# Altium PCB my.PcbDoc (part 1 of 3)
Units mm, origin at the board's own origin, x right, y up, seen from the top; angles counter-clockwise.
Board outline 100 x 100 mm, 4 copper layers (Top Layer, Internal Plane 1, Internal Plane 2, Bottom Layer); 136 components, 166 nets, 575 pads, 210 vias.
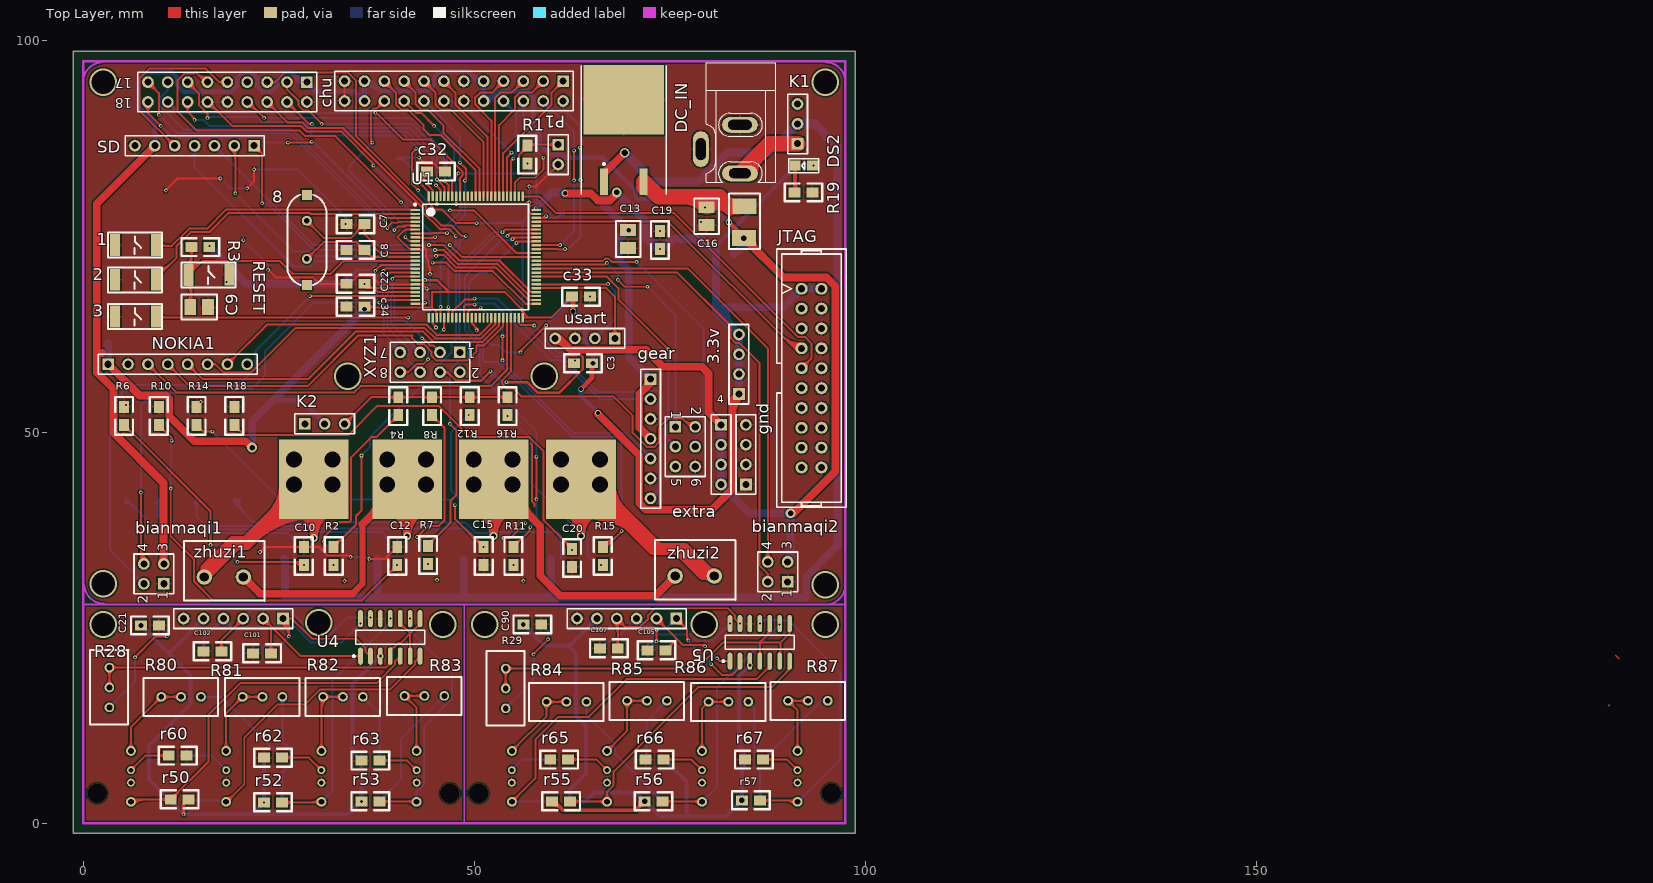
[diagram p0: Top Layer view]
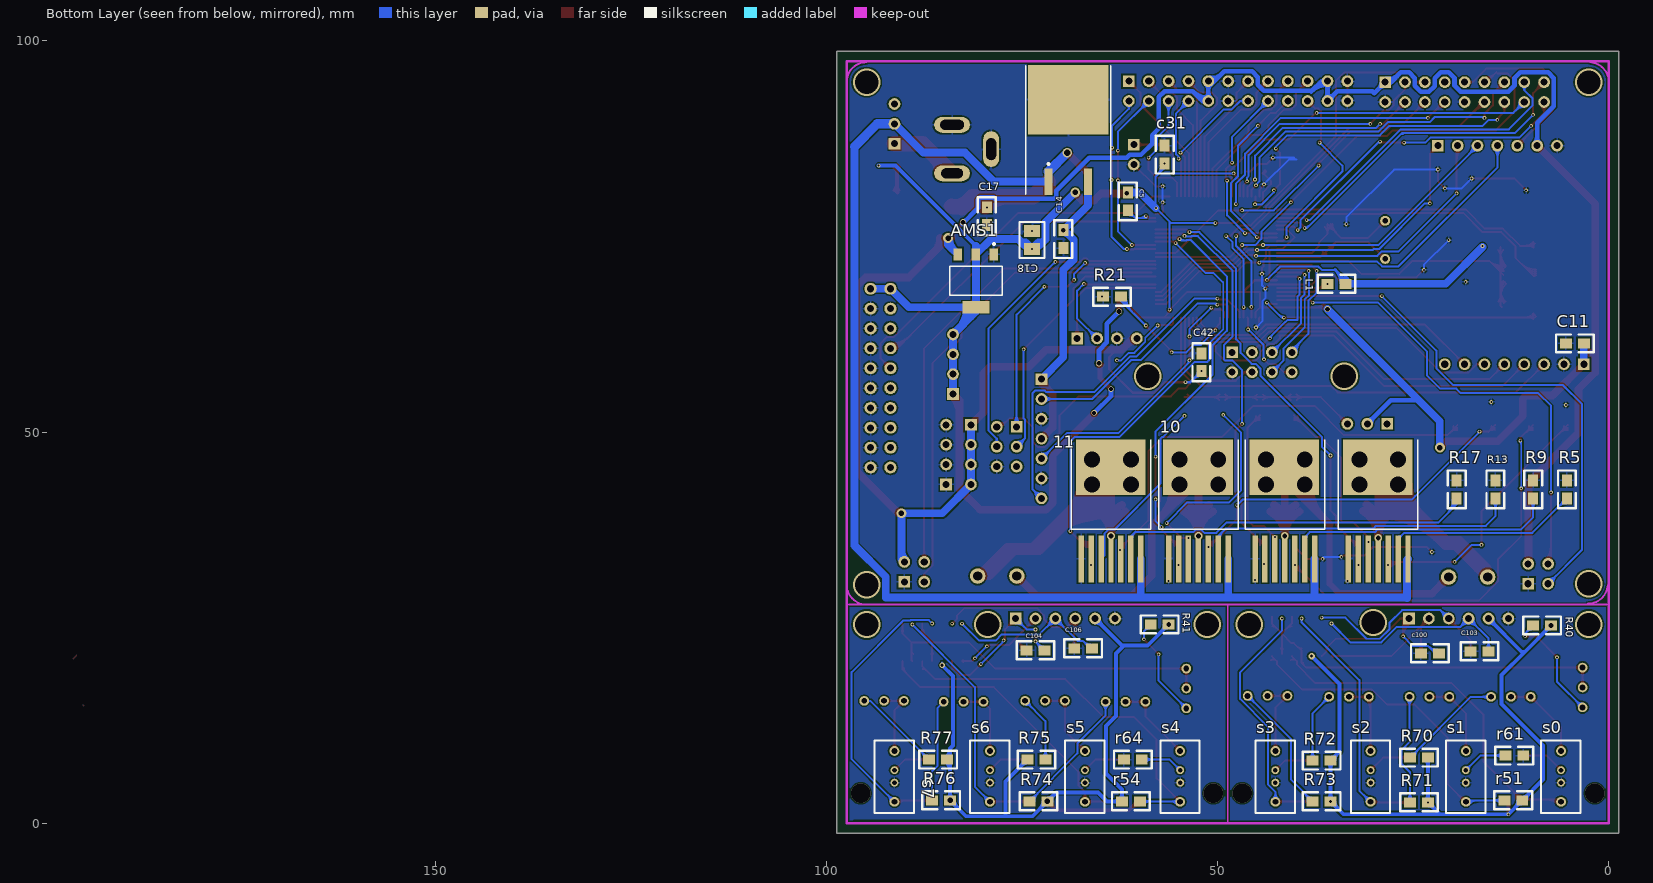
[diagram p1: Bottom Layer view, seen from below]
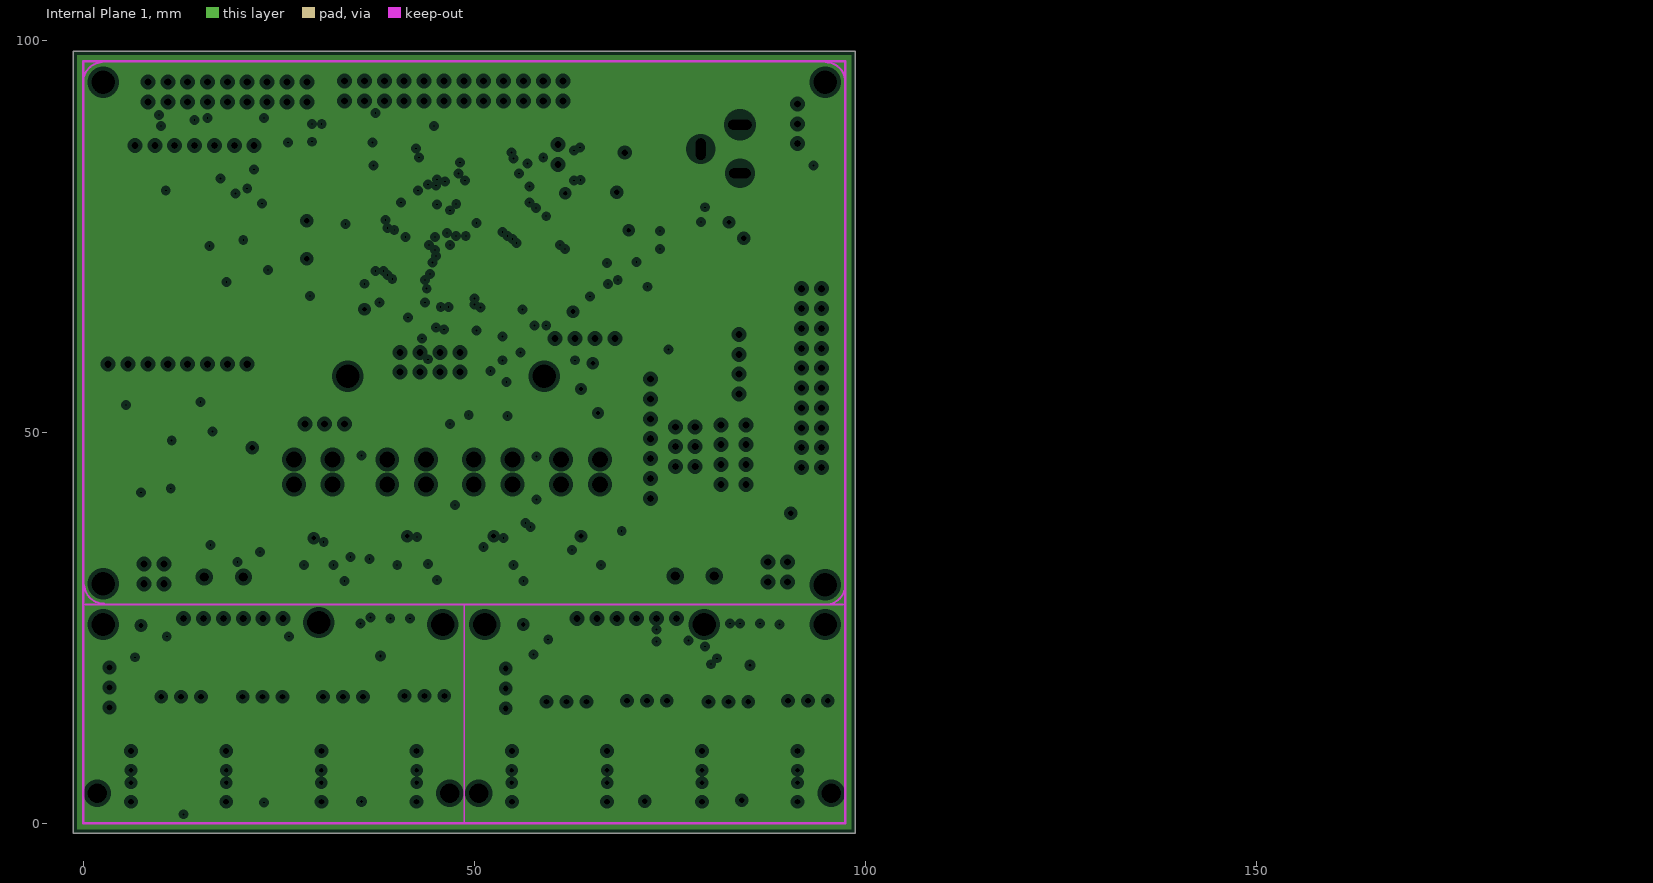
[diagram p2: Internal Plane 1, clearances drawn from the general rule]
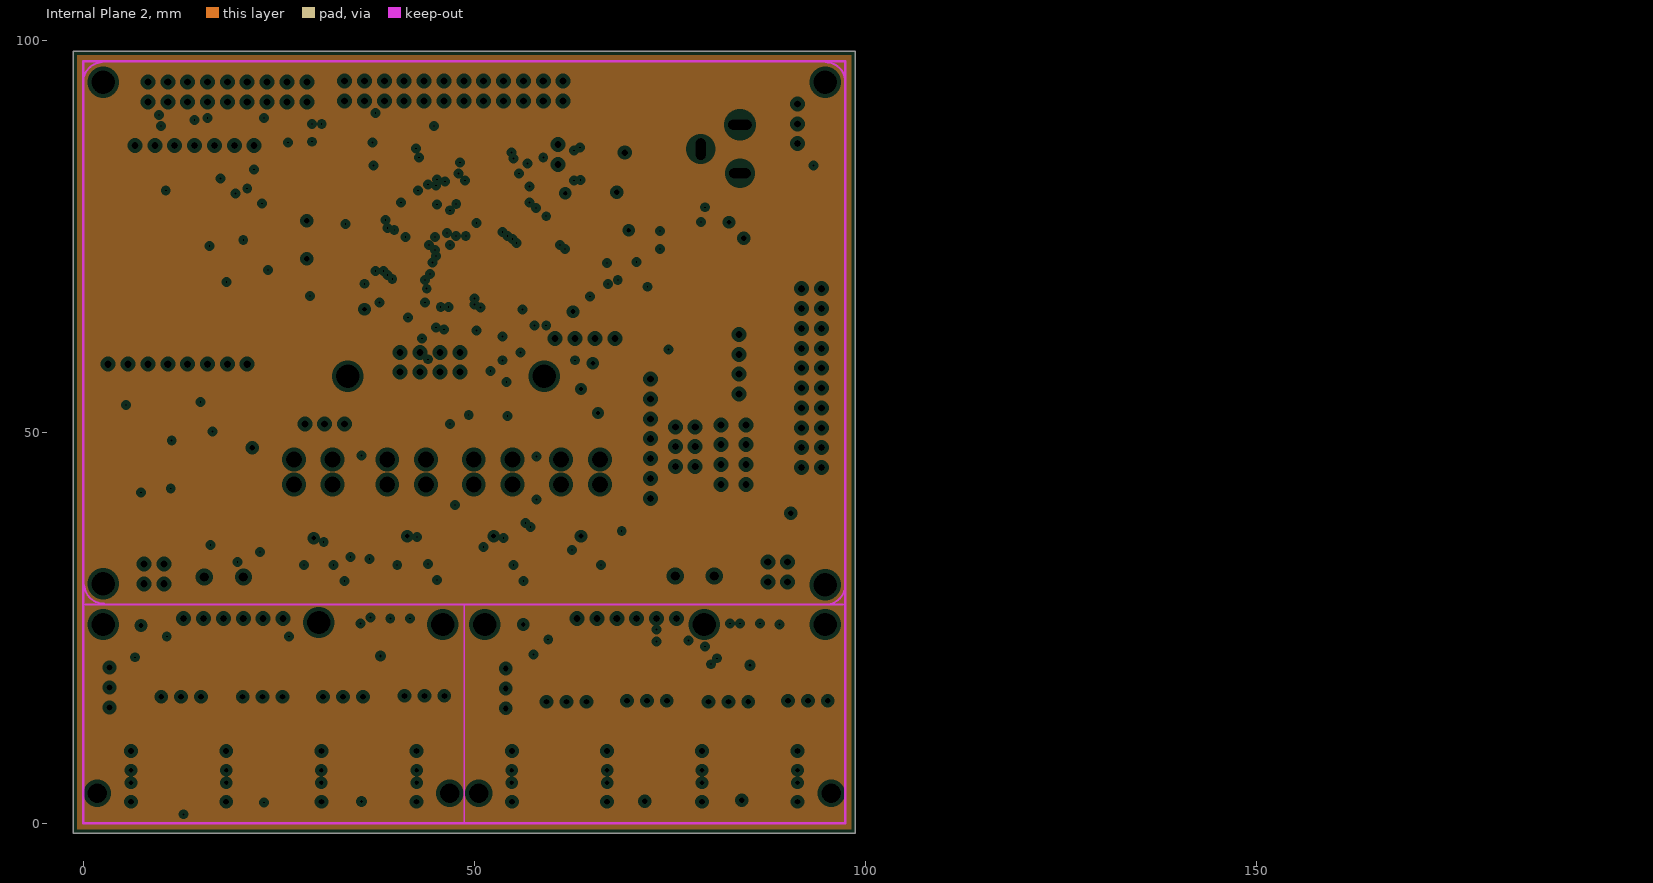
[diagram p3: Internal Plane 2, clearances drawn from the general rule]

## Layer stack, top to bottom
Top Layer: signal copper 0.0356
Dielectric: dielectric 0.32, FR-4, Dk 4.8
Internal Plane 1: plane copper 0.0356
Dielectric: dielectric 0.32, FR-4, Dk 4.8
Internal Plane 2: plane copper 0.0356
Dielectric: dielectric 0.32, FR-4, Dk 4.8
Bottom Layer: signal copper 0.0356

## Board outline
-1.3,-1.3 98.7,-1.3 98.7,98.7 -1.3,98.7

## Design rules (kind name [scope] priority, off if disabled: settings)
Clearance [All] p1: gap=0.2
PlaneClearance [All] p1: clearance=0.508
PlaneConnect [All] p1: planeconnectstyle=Relief reliefexpansion=0.508 reliefentries=4 reliefconductorwidth=0.254 reliefairgap=0.254
PolygonConnect [All] p1: connectstyle=Relief reliefconductorwidth=0.254 reliefentries=4 polygonreliefangle="90 Angle"
RoutingVias [All] p1: holewidth=0.6 width=1 viastyle="Through Hole" minholewidth=0.711 minwidth=1.27 maxholewidth=0.711 maxwidth=1.27
SilkscreenOverComponentPads [All] p1: minsilkscreentomaskgap=0.254
SolderMaskExpansion [All] p1: expansion=0.102
Width [All] p1: maxlimit=2 minlimit=0.2 preferedwidth=0.2 minimp=50.000000 maximp=50.000000 favimp=50.000000
25 further rules are at their usual default settings.

## Components (designator, comment, footprint, x,y, rotation, side; value= is the part's Value field where it differs from the comment)
1 "KEY_M" "PCBComponent_1 - duplicate3" 4.064,73.914 r270 top
2 "KEY_M" "PCBComponent_1 - duplicate3" 4.064,69.469 r270 top
3 "KEY_M" "PCBComponent_1 - duplicate3" 4.064,64.77 r270 top
3.3v "Header 4" HDR1X4 83.82,54.864 r90 top
4 "Header 4" HDR1X4 81.534,50.927 r270 top
7 "bts7960" miaoBTS7960 33.274,33.782 r90 bottom
8 "8MHz" XTAL_US 28.575,72.136 r90 top
9 "bts7960" miaoBTS7960 45.212,33.782 r90 bottom
10 "bts7960" miaoBTS7960 56.261,33.782 r90 bottom
11 "bts7960" miaoBTS7960 67.437,33.782 r90 bottom
AMS1 "REG1117-3.3" ZZ311 80.899,69.342 r0 bottom
bianmaqi1 "Header 2X2" HDR2X2 10.287,30.607 r90 top
bianmaqi2 "Header 2X2" HDR2X2 90.043,30.861 r90 top
C3 "Cap" 0805 65.024,58.801 r180 top
C5 "Cap" 0805 61.468,80.645 r270 bottom
C7 "Cap" 0805 35.941,76.581 r180 top
C8 "Cap" 0805 35.941,73.279 r180 top
C9 "Cap Pol1" "PCBCom- duplicate" 14.173,66.802 r90 top
C10 "Cap" 0805 28.194,35.306 r270 top
C11 "Cap" 0805 5.461,61.341 r180 bottom
C12 "Cap" 0805 40.132,35.306 r270 top
C13 "Cap Pol1" "PCBCom- duplicate" 70.485,75.311 r0 top
C14 "Cap" 0805 69.723,73.533 r90 bottom
C15 "Cap" 0805 51.181,33.02 r90 top
C16 "Cap Pol1" "PCBCom- duplicate" 80.518,78.232 r0 top
C17 "Cap" 0805 79.502,76.454 r90 bottom
C18 "Cap Pol1" "PCBCom- duplicate" 74.549,73.914 r0 bottom
C19 "Cap" 0805 73.724,75.692 r270 top
C20 "Cap" 0805 62.484,32.766 r90 top
C21 "Cap" 0805 9.652,25.273 r180 top
C22 "Cap" 0805 35.941,68.961 r180 top
c31 "Cap" 0805 56.769,86.614 r270 bottom
c32 "Cap" 0805 46.228,83.312 r180 top
c33 "Cap" 0805 64.77,67.31 r180 top
c34 "Cap" 0805 33.655,66.04 r0 top
C42 "Cap" 0805 52.07,57.785 r90 bottom
C90 "Cap" 0805 58.547,25.4 r180 top
c100 "Cap" 0805 21.717,21.717 r0 bottom (schematic designator C100)
C101 "Cap" 0805 24.003,21.717 r180 top
C102 "Cap" 0805 17.653,21.971 r180 top
C103 "Cap" 0805 15.367,21.973 r0 bottom
C104 "Cap" 0805 72.136,22.098 r0 bottom
C105 "Cap" 0805 74.422,22.1 r180 top
C106 "Cap" 0805 66.04,22.352 r0 bottom
C107 "Cap" 0805 68.326,22.354 r180 top
camera1 "Header 9X2" HDR2X9 28.575,94.742 r180 top
chu "Header 12X2" HDR2X12 61.341,94.869 r180 top
chu1 "Header 6" HDR1X6 25.527,26.162 r180 top
chu2 "Header 6" HDR1X6 75.819,26.162 r180 top
DC_IN "POWER" DC10B 79.629,93.726 r270 top
DS2 "LED1" SMDLED 93.218,84.074 r180 top
extra "Header 3X2" HDR2X3 75.692,50.673 r270 top
gear "Header 7" HDR1X7 72.517,56.769 r270 top
gnd "Header 4" HDR1X4 84.709,43.307 r90 top
JTAG "JTAG" JTAG_20 93.091,56.896 r270 top
K1 "Header 3" HDR1X3 91.313,86.868 r90 top
K2 "Header 3" HDR1X3 28.321,51.054 r0 top
L1 "" 0805 35.941,68.961 r180 bottom
NOKIA1 "Header 8" HDR1X8 3.175,58.674 r0 top
P1 "Header 2" HDR1X2 60.706,86.741 r270 top
R1 "Res2" 0805 56.769,84.328 r90 top
R2 "10k" 0805 32.004,33.02 r90 top
R3 "Res2" 0805 13.818,73.66 r0 top
R4 "Res2" 0805 40.259,52.168 r90 top
R5 "Res2" 0805 5.337,41.529 r90 bottom
R6 "Res2" 0805 5.207,50.927 r90 top
R7 "Res2" 0805 44.069,33.147 r90 top
R8 "Res2" 0805 44.577,52.168 r90 top
R9 "Res2" 0805 9.655,41.529 r90 bottom
R10 "Res2" 0805 9.652,50.927 r90 top
R11 "Res2" 0805 54.991,33.02 r90 top
R12 "Res2" 0805 49.403,52.168 r90 top
R13 "Res2" 0805 14.478,41.529 r90 bottom
R14 "Res2" 0805 14.478,50.927 r90 top
R15 "Res2" 0805 66.421,33.02 r90 top
R16 "Res2" 0805 54.229,52.168 r90 top
R17 "Res2" 0805 19.431,41.529 r90 bottom
R18 "Res2" 0805 19.304,50.927 r90 top
R19 "Res2" 0805 90.932,80.645 r0 top
R21 "Res2" 0805 64.643,67.31 r180 bottom
R28 "Res Tap" "PCBComponent_1 - duplicate2" 3.302,13.589 r90 top
R29 "Res Tap" "PCBComponent_1 - duplicate2" 53.975,13.462 r90 top
R40 "Res2" 0805 7.366,25.273 r0 bottom
R41 "Res2" 0805 56.261,25.4 r0 bottom
r50 "Res2" 0805 13.462,3.048 r180 top
r51 "Res2" 0805 11.049,2.921 r0 bottom
r52 "Res2" 0805 23.114,2.667 r0 top
r53 "Res2" 0805 35.56,2.794 r0 top
r54 "Res2" 0805 62.23,2.794 r180 bottom
r55 "Res2" 0805 59.944,2.794 r0 top
r56 "Res2" 0805 71.755,2.794 r0 top
r57 "Res2" 0805 84.201,2.921 r0 top
r60 "Res2" 0805 13.208,8.636 r180 top
r61 "Res2" 0805 10.922,8.636 r0 bottom
r62 "Res2" 0805 23.114,8.382 r0 top
r63 "Res2" 0805 35.56,8.001 r0 top
r64 "Res2" 0805 61.976,8.128 r180 bottom
r65 "Res2" 0805 59.69,8.128 r0 top
r66 "Res2" 0805 71.882,8.128 r0 top
r67 "Res2" 0805 84.582,8.128 r0 top
R70 "Res2" 0805 23.114,8.382 r0 bottom
R71 "Res2" 0805 23.114,2.667 r0 bottom
R72 "Res2" 0805 35.56,8.001 r0 bottom
R73 "Res2" 0805 35.56,2.792 r0 bottom
R74 "Res2" 0805 71.755,2.792 r0 bottom
R75 "Res2" 0805 74.295,8.128 r180 bottom
R76 "Res2" 0805 84.201,2.923 r0 bottom
R77 "Res2" 0805 84.582,8.128 r0 bottom
R80 "Res Tap" "PCBComponent_1 - duplicate2" 16.256,16.129 r180 top
R81 "Res Tap" "PCBComponent_1 - duplicate2" 26.67,16.129 r180 top
R82 "Res Tap" "PCBComponent_1 - duplicate2" 36.957,16.129 r180 top
R83 "Res Tap" "PCBComponent_1 - duplicate2" 47.371,16.256 r180 top
R84 "Res Tap" "PCBComponent_1 - duplicate2" 65.532,15.494 r180 top
R85 "Res Tap" "PCBComponent_1 - duplicate2" 75.819,15.621 r180 top
R86 "Res Tap" "PCBComponent_1 - duplicate2" 86.233,15.494 r180 top
R87 "Res Tap" "PCBComponent_1 - duplicate2" 96.393,15.621 r180 top
RESET "KEY_M" "PCBComponent_1 - duplicate3" 13.462,70.104 r270 top
s0 "chazuo" "PCBComponent_1 - duplicate1" 6.088,9.231 r270 bottom
s1 "chazuo" "PCBComponent_1 - duplicate1" 18.263,9.231 r270 bottom
s2 "chazuo" "PCBComponent_1 - duplicate1" 30.438,9.231 r270 bottom
s3 "chazuo" "PCBComponent_1 - duplicate1" 42.613,9.231 r270 bottom
s4 "chazuo" "PCBComponent_1 - duplicate1" 54.788,9.231 r270 bottom
s5 "chazuo" "PCBComponent_1 - duplicate1" 66.963,9.231 r270 bottom
s6 "chazuo" "PCBComponent_1 - duplicate1" 79.1,9.231 r270 bottom
s7 "chazuo" "PCBComponent_1 - duplicate1" 91.312,9.231 r270 bottom
SAFE "" 1812 84.455,77.851 r180 top
SD "Header 7" HDR1X7 21.844,86.614 r180 top
U1 "STM32F407VET6" LQFP100_V 50.165,72.39 r0 top
U2 "L7805ABD2T" TO-263 69.088,87.249 r180 bottom
U3 "L7805ABD2T" TO-263 69.088,87.249 r0 top
U4 "LM339AD" SO14_N 39.243,23.749 r90 top
U5 "LM339AD" SO14_N 86.487,23.114 r90 top
usart "Header 4" HDR1X4 67.945,61.976 r180 top
XYZ1 "Header 4X2" HDR2X4 48.133,60.198 r180 top
zhuzi1 "Header 2H" "PCBComponent_1 - duplicate" 18.288,32.385 r0 top
zhuzi2 "Header 2H" "PCBComponent_1 - duplicate" 78.486,32.512 r0 top

## Footprints (in the part's own frame and the unit in brackets; to place one, negate y for a bottom-side part, rotate by r counter-clockwise, add the part's x,y. Pads: shape width x height; smd on the part's side, far side on the other; paste and mask are expansions set on the pad)
0805 [mil]
  rect 60x50 smd: 1(0,-0.06) 2(90,-0.06)
  silkscreen extent -50,-45 140,45
1812 [mil]
  rect 120x80 smd: 1(0,120) 2(-2.5,-40)
  silkscreen extent -80,-105 75,175
DC10B [mil]
  oval 80x180 hole 50 slot 110 at 90 deg: 1(419.09,170)
  oval 80x180 hole 50 slot 120 at 90 deg: 2(175,170)
  oval 180x80 hole 50 slot 110 at 0 deg: 3(297.05,-26.85)
  silkscreen extent -138,0 465,350
HDR1X2 [mm] "Connector; Header; 2 Position"
  rect 1.5x1.5 hole 0.9: 1(0,0)
  round 1.5 hole 0.9: 2(2.54,0)
  silkscreen extent -1.27,-1.27 3.81,1.27
HDR1X3 [mm] "Connector; Header; 3 Position"
  rect 1.5x1.5 hole 0.9: 1(0,0)
  round 1.5 hole 0.9: 2(2.54,0) 3(5.08,0)
  silkscreen extent -1.27,-1.27 6.35,1.27
HDR1X4 [mm] "Connector; Header; 4 Position"
  rect 1.5x1.5 hole 0.9: 1(0,0)
  round 1.5 hole 0.9: 2(2.54,0) 3(5.08,0) 4(7.62,0)
  silkscreen extent -1.27,-1.27 8.89,1.27
HDR1X6 [mm] "Connector; Header; 6 Position"
  rect 1.5x1.5 hole 0.9: 1(0,0)
  round 1.5 hole 0.9: 2(2.54,0) 3(5.08,0) 4(7.62,0) 5(10.16,0) 6(12.7,0)
  silkscreen extent -1.27,-1.27 13.97,1.27
HDR1X7 [mm] "Connector; Header; 7 Position"
  rect 1.5x1.5 hole 0.9: 1(0,0)
  round 1.5 hole 0.9: 2(2.54,0) 3(5.08,0) 4(7.62,0) 5(10.16,0) 6(12.7,0) 7(15.24,0)
  silkscreen extent -1.27,-1.27 16.51,1.27
HDR1X8 [mm] "Connector; Header; 8 Position"
  rect 1.5x1.5 hole 0.9: 1(0,0)
  round 1.5 hole 0.9: 2(2.54,0) 3(5.08,0) 4(7.62,0) 5(10.16,0) 6(12.7,0) 7(15.24,0) 8(17.78,0)
  silkscreen extent -1.27,-1.27 19.05,1.27
HDR2X2 [mm] "Connector; Header; 2x2 Position"
  rect 1.5x1.5 hole 0.9: 1(0,0)
  round 1.5 hole 0.9: 2(0,2.54) 3(2.54,0) 4(2.54,2.54)
  silkscreen extent -1.27,-1.27 3.81,3.81
HDR2X3 [mm] "Connector; Header; 3x2 Position"
  rect 1.5x1.5 hole 0.9: 1(0,0)
  round 1.5 hole 0.9: 2(0,2.54) 3(2.54,0) 4(2.54,2.54) 5(5.08,0) 6(5.08,2.54)
  silkscreen extent -1.27,-1.27 6.35,3.81
HDR2X4 [mm] "Connector; Header; 4x2 Position"
  rect 1.5x1.5 hole 0.9: 1(0,0)
  round 1.5 hole 0.9: 2(0,2.54) 3(2.54,0) 4(2.54,2.54) 5(5.08,0) 6(5.08,2.54) 7(7.62,0) 8(7.62,2.54)
  silkscreen extent -1.27,-1.27 8.89,3.81
HDR2X9 [mm] "Connector; Header; 9x2 Position"
  rect 1.5x1.5 hole 0.9: 1(0,0)
  round 1.5 hole 0.9: 2(0,2.54) 3(2.54,0) 4(2.54,2.54) 5(5.08,0) 6(5.08,2.54) 7(7.62,0) 8(7.62,2.54) 9(10.16,0) 10(10.16,2.54) 11(12.7,0) 12(12.7,2.54) 13(15.24,0) 14(15.24,2.54) 15(17.78,0) 16(17.78,2.54) 17(20.32,0) 18(20.32,2.54)
  silkscreen extent -1.27,-1.27 21.59,3.81
HDR2X12 [mm] "Connector; Header; 12x2 Position"
  rect 1.5x1.5 hole 0.9: 1(0,0)
  round 1.5 hole 0.9: 2(0,2.54) 3(2.54,0) 4(2.54,2.54) 5(5.08,0) 6(5.08,2.54) 7(7.62,0) 8(7.62,2.54) 9(10.16,0) 10(10.16,2.54) 11(12.7,0) 12(12.7,2.54) 13(15.24,0) 14(15.24,2.54) 15(17.78,0) 16(17.78,2.54) 17(20.32,0) 18(20.32,2.54) 19(22.86,0) 20(22.86,2.54) 21(25.4,0) 22(25.4,2.54) 23(27.94,0) 24(27.94,2.54)
  silkscreen extent -1.27,-1.27 29.21,3.81
JTAG_20 [mm]
  oval 1.5x1.575 hole 0.9: 1(-11.43,-1.27) 2(-11.43,1.27) 3(-8.89,-1.27) 4(-8.89,1.27) 5(-6.35,-1.27) 6(-6.35,1.27) 7(-3.81,-1.27) 8(-3.81,1.27) 9(-1.27,-1.27) 10(-1.27,1.27) 11(1.27,-1.27) 12(1.27,1.27) 13(3.81,-1.27) 14(3.81,1.27) 15(6.35,-1.27) 16(6.35,1.27) 17(8.89,-1.27) 18(8.89,1.27) 19(11.43,-1.27) 20(11.43,1.27)
  silkscreen extent -16.51,-4.45 16.51,4.45
LQFP100_V [mm] "Thin QFP, 100-Leads, Body 14x14mm, Pitch 0.5mm, ST Recommended"
  rect 1.2x0.3 smd: 1(-7.75,6) 2(-7.75,5.5) 3(-7.75,5) 4(-7.75,4.5) 5(-7.75,4) 6(-7.75,3.5) 7(-7.75,3) 8(-7.75,2.5) 9(-7.75,2) 10(-7.75,1.5) 11(-7.75,1) 12(-7.75,0.5) 13(-7.75,0) 14(-7.75,-0.5) 15(-7.75,-1) 16(-7.75,-1.5) 17(-7.75,-2) 18(-7.75,-2.5) 19(-7.75,-3) 20(-7.75,-3.5) 21(-7.75,-4) 22(-7.75,-4.5) 23(-7.75,-5) 24(-7.75,-5.5) 25(-7.75,-6) 51(7.75,-6) 52(7.75,-5.5) 53(7.75,-5) 54(7.75,-4.5) 55(7.75,-4) 56(7.75,-3.5) 57(7.75,-3) 58(7.75,-2.5) 59(7.75,-2) 60(7.75,-1.5) 61(7.75,-1) 62(7.75,-0.5) 63(7.75,0) 64(7.75,0.5) 65(7.75,1) 66(7.75,1.5) 67(7.75,2) 68(7.75,2.5) 69(7.75,3) 70(7.75,3.5) 71(7.75,4) 72(7.75,4.5) 73(7.75,5) 74(7.75,5.5) 75(7.75,6)
  rect 0.3x1.2 smd: 26(-6,-7.75) 27(-5.5,-7.75) 28(-5,-7.75) 29(-4.5,-7.75) 30(-4,-7.75) 31(-3.5,-7.75) 32(-3,-7.75) 33(-2.5,-7.75) 34(-2,-7.75) 35(-1.5,-7.75) 36(-1,-7.75) 37(-0.5,-7.75) 38(0,-7.75) 39(0.5,-7.75) 40(1,-7.75) 41(1.5,-7.75) 42(2,-7.75) 43(2.5,-7.75) 44(3,-7.75) 45(3.5,-7.75) 46(4,-7.75) 47(4.5,-7.75) 48(5,-7.75) 49(5.5,-7.75) 50(6,-7.75) 76(6,7.75) 77(5.5,7.75) 78(5,7.75) 79(4.5,7.75) 80(4,7.75) 81(3.5,7.75) 82(3,7.75) 83(2.5,7.75) 84(2,7.75) 85(1.5,7.75) 86(1,7.75) 87(0.5,7.75) 88(0,7.75) 89(-0.5,7.75) 90(-1,7.75) 91(-1.5,7.75) 92(-2,7.75) 93(-2.5,7.75) 94(-3,7.75) 95(-3.5,7.75) 96(-4,7.75) 97(-4.5,7.75) 98(-5,7.75) 99(-5.5,7.75) 100(-6,7.75)
  silkscreen extent -7.87,-6.75 6.75,6.82, body extent -7,-7 7,7, height 1.6
miaoBTS7960 [mm]
  rect 6x0.7 smd: 1(0,0) 2(0,-1.27) 3(0,-2.54) 4(0,-3.81) 5(0,-5.08) 6(0,-6.35) 7(0,-7.62)
  round 2.54 hole 2.032: 4(9.525,-6.35) 4(9.525,-1.397) 4(12.7,-6.35) 4(12.7,-1.397)
  rect 10.16x8.89 smd far side: 4(10.16,-3.81)
  rect 7.112x8.89 smd: 4(11.709,-3.759)
  silkscreen extent 3.81,-8.89 15.24,1.27
"PCBCom- duplicate" [mil]
  rect 80x60 smd: 1(-32.5,20) 2(-32.5,-70)
  silkscreen extent -95,-115 30,65
"PCBComponent_1 - duplicate" [mil]
  round 78 hole 47.24: 1(-111,-36) 2(85.85,-36)
  silkscreen extent -213,-156 192,144
"PCBComponent_1 - duplicate1" [mm]
  round 1.25 hole 0.75: 1(0,0) 4(6.5,0)
  round 1 hole 0.6: 2(2.45,0) 3(4.05,0)
  silkscreen extent -1.35,-2.54 7.95,2.49
"PCBComponent_1 - duplicate2" [mm]
  round 1.25 hole 0.75: 1(1.219,-0.025) 2(3.759,-0.025) 3(6.299,-0.025)
  silkscreen extent -0.99,-2.46 8.54,2.43
"PCBComponent_1 - duplicate3" [mm] "Circuit Brea"
  rect 2.8x1.27 smd: 1(-0.025,5.2) 2(0,0)
  silkscreen extent -1.6,-0.94 1.6,6.02
SMDLED [mm]
  rect 1.4x1.27 smd: 1(0.001,-0.002) 2(2.211,-0.002)
  silkscreen extent -0.8,-0.89 3.01,0.89
SO14_N [mm] "SOIC, 14-Leads, Body 8.7x3.9mm, Pitch 1.27mm, IPC Medium Density"
  oval 2.2x0.6 smd: 1(-2.4,3.81) 2(-2.4,2.54) 3(-2.4,1.27) 4(-2.4,0) 5(-2.4,-1.27) 6(-2.4,-2.54) 7(-2.4,-3.81) 8(2.4,-3.81) 9(2.4,-2.54) 10(2.4,-1.27) 11(2.4,0) 12(2.4,1.27) 13(2.4,2.54) 14(2.4,3.81)
  silkscreen extent -2.52,-4.4 0.9,4.78, body extent -1.95,-4.33 1.95,4.33, height 1.75
TO-263 [mm] "D2-PAK/TO-263-AB; 3 Leads (1 Cropped); Body 15.9 (inc. leads) x 10.4 mm (LxW max)"
  rect 1x3.4 smd: 1(-2.54,-5.225) 3(2.54,-5.225)
  rect 10.25x8.9 smd: 4(0,5.225)
  silkscreen extent -5.43,-6.83 5.43,9.57
XTAL_US [mil]
  round 50 hole 28: 1(0,0) 2(192.13,0)
  rect 50x50 smd: ""(-130.32,0) ""(322.44,0)
  silkscreen extent -131,-98 323,98
ZZ311 [mm] "SOT-223/SC-73; 4 Leads; Body 6.7 x 7.3 mm, inc. leads (LxW max)"
  rect 1.1x1.55 smd: 1(-2.3,-3.375) 2(0,-3.375) 3(2.3,-3.375)
  rect 3.45x1.55 smd: 4(0,3.375)
  silkscreen extent -3.35,-4.82 3.35,1.85

## Part data
3.3v 4 gnd usart: "Header, 4-Pin"
8: library part XTAL, "Cryst"
AMS1: "800mA and 1A Low Dropout Positive Regulator 2.85V, 3.3V, 5V, and Adjustable"
bianmaqi1 bianmaqi2: "Header, 2-Pin, Dual row"
C9 C13 C16 C18: "Polarized Capacitor (Radial)"
camera1: "Header, 9-Pin, Dual row"
chu: "Header, 12-Pin, Dual row"
chu1 chu2: "Header, 6-Pin"
DS2: library part LED2, "Typical RED, GREEN, YELLOW, A"
extra: "Header, 3-Pin, Dual row"
gear SD: "Header, 7-Pin"
K1 K2: "Header, 3-Pin"
L1 R2: library part Res2, "Re"
NOKIA1: "Header, 8-Pin"
P1: "Header, 2-Pin"
R1 R3 R4 R5 R6 R7 R8 R9 R10 R11 R12 R13 R14 R15 R16 R17 R18 R19 R21 R40 R41 r50 r51 r52 r53 r54 r55 r56 r57 r60 r61 r62 r63 r64 r65 r66 r67 R70 R71 R72 R73 R74 R75 R76 R77: "Re"
R28 R29 R80 R81 R82 R83 R84 R85 R86 R87: "Tapped Resistor"
SAFE: library part Cap, "Capacitor"
U1: "ARM Cortex-M4 32b MCU+FPU, 210DMIP, 512 kB Flash, 192+4 kB RAM, Camera, 82 I/Os, 100-pin LQFP, -40 to +85癈, Tray"
U2 U3: "Precision 1A Regulator"
U4 U5: "Low-Power Quad Voltage Comparator"
XYZ1: "Header, 4-Pin, Dual row"
zhuzi1 zhuzi2: "Header, 2-Pin, Right Angle"

## Via types
v1: diameter 0.457, hole 0.254, Top Layer to Bottom Layer, 170 vias
v2: diameter 3.5, hole 3, Top Layer to Bottom Layer, 12 vias
v3: diameter 0.8, hole 0.6, Top Layer to Bottom Layer, 7 vias
v4: diameter 1.27, hole 0.711, Top Layer to Bottom Layer, 6 vias
v5: diameter 1, hole 0.6, Top Layer to Bottom Layer, 5 vias
v6: diameter 2.5, hole 2.5, Top Layer to Bottom Layer, tented bottom, 4 vias
v7: diameter 0.7, hole 0.5, Top Layer to Bottom Layer, 2 vias
v8: diameter 0.8, hole 0.4, Top Layer to Bottom Layer, 2 vias
v9: diameter 0.7, hole 0.4, Top Layer to Bottom Layer, 1 vias
v10: diameter 1.2, hole 0.8, Top Layer to Bottom Layer, 1 vias

## Nets (pads, with @x,y where several pads share a name; then routed paths per layer and width w, separated by ;. In a path a pad name is that pad's centre, name@x,y a point inside that pad or via, vN(x,y) a via of type N, cw(c..) or ccw(c..) an arc to the next point about the centre after c; other vN are vias at no path point)
A0: chu.1 U1.81 | length 21.7
  Top Layer w0.254: U1.81@53.665,80.14 53.665,85.67 59.878,91.883 59.878,93.406 chu.1@61.341,94.869 ; chu.1@60.718,94.869 cw(c59.214,94.869) 60.277,93.805 cw(c61.341,92.742) chu.1@61.341,94.246 ; chu.1@60.972,94.869 cw(c60.081,94.869) 60.711,94.239 cw(c61.341,93.609) chu.1@61.341,94.5
A1: chu.3 U1.82 | length 21.7
  Top Layer w0.254: U1.82@53.165,80.14 53.165,89.233 55.184,91.252 55.184,92.775 55.815,93.406 57.338,93.406 chu.3@58.801,94.869 ; chu.3@58.178,94.869 cw(c56.674,94.869) 57.737,93.805 cw(c58.801,92.742) chu.3@58.801,94.246 ; chu.3@58.432,94.869 cw(c57.541,94.869) 58.171,94.239 cw(c58.801,93.609) chu.3@58.801,94.5
A2: chu.5 U1.83 | length 20.9
  Top Layer w0.254: U1.83@52.665,80.14 52.644,80.161 52.644,92.775 53.275,93.406 54.798,93.406 chu.5@56.261,94.869 ; chu.5@55.638,94.869 cw(c54.134,94.869) 55.197,93.805 cw(c56.261,92.742) chu.5@56.261,94.246 ; chu.5@55.892,94.869 cw(c55.001,94.869) 55.631,94.239 cw(c56.261,93.609) chu.5@56.261,94.5
A3: chu.7 U1.84 | length 21.7
  Top Layer w0.254: U1.84@52.165,80.14 52.165,89.822 50.104,91.883 50.104,92.775 50.735,93.406 52.258,93.406 chu.7@53.721,94.869 ; chu.7@53.098,94.869 cw(c51.594,94.869) 52.657,93.805 cw(c53.721,92.742) chu.7@53.721,94.246 ; chu.7@53.352,94.869 cw(c52.461,94.869) 53.091,94.239 cw(c53.721,93.609) chu.7@53.721,94.5
A4: chu.13 U1.85 | length 20.8
  Top Layer w0.254: chu.13@46.101,94.246 cw(c46.101,92.742) 47.165,93.805 cw(c48.228,94.869) chu.13@46.724,94.869 ; chu.13@46.101,94.5 cw(c46.101,93.609) 46.731,94.239 cw(c47.361,94.869) chu.13@46.47,94.869 ; chu.13@46.101,94.869 47.564,93.406 47.564,91.883 51.665,87.782 U1.85@51.665,80.14
A5: chu.15 U1.86 | length 22.4
  Top Layer w0.254: chu.15@43.561,94.246 cw(c43.561,92.742) 44.625,93.805 cw(c45.688,94.869) chu.15@44.184,94.869 ; chu.15@43.561,94.5 cw(c43.561,93.609) 44.191,94.239 cw(c44.821,94.869) chu.15@43.93,94.869 ; chu.15@43.561,94.869 45.024,93.406 45.024,91.883 45.655,91.252 46.981,91.252 51.165,87.068 U1.86@51.165,80.14
A6: chu.17 U1.87 | length 23
  Top Layer w0.254: chu.17@41.021,94.246 cw(c41.021,92.742) 42.085,93.805 cw(c43.148,94.869) chu.17@41.644,94.869 ; chu.17@41.021,94.5 cw(c41.021,93.609) 41.651,94.239 cw(c42.281,94.869) chu.17@41.39,94.869 ; chu.17@41.021,94.869 42.484,93.406 42.484,91.883 43.115,91.252 44.002,91.252 46.04,89.214 46.04,88.269 50.665,83.644 U1.87@50.665,80.14
A7: chu.19 U1.88 | length 24.7
  Top Layer w0.254: chu.19@38.481,94.246 cw(c38.481,92.742) 39.545,93.805 cw(c40.608,94.869) chu.19@39.104,94.869 ; chu.19@38.481,94.5 cw(c38.481,93.609) 39.111,94.239 cw(c39.741,94.869) chu.19@38.85,94.869 ; chu.19@38.481,94.869 39.944,93.406 39.944,91.883 40.575,91.252 41.462,91.252 43.5,89.214 43.5,88.708 44.229,87.979 45.688,87.979 50.165,83.502 U1.88@50.165,80.14
ANG: U1.30 XYZ1.8 | length 12.6
  Top Layer w0.254: XYZ1.8@40.513,57.658 41.53,57.658 ; XYZ1.8@41.068,57.375 cw(c41.53,57.14) 41.53,57.658 ; XYZ1.8@41.068,57.941 ccw(c41.53,58.176) 41.53,57.658 ; v1(44.069,59.309) 43.495,58.735 42.607,58.735 41.53,57.658 ; v1@46.029,63.191 ccw(c45.757,63.463) 46.142,63.463 ; v1(46.101,63.119) 46.142,63.16 46.142,64.617 U1.30@46.165,64.64
  Bottom Layer w0.254: v1@43.997,59.381 ccw(c43.676,59.702) 44.13,59.702 ; v1(44.069,59.309) 44.13,59.37 44.13,61.148 v1(46.101,63.119) ; v1@45.999,63.119 cw(c45.754,63.119) 45.928,62.946 cw(c46.101,62.772) v1@46.101,63.017
BLACK1: bianmaqi1.4 U1.24 | length 69.1
  Top Layer w0.254: v1@7.294,42.219 cw(c7.121,42.046) 7.366,42.046 cw(c7.611,42.046) v1@7.438,42.219 ; 7.366,34.344 ccw(c8.944,34.344) bianmaqi1.4@7.828,33.228 ; 7.366,34.958 ccw(c9.558,34.958) bianmaqi1.4@8.008,33.408 ; 7.366,35.571 ccw(c10.171,35.571) bianmaqi1.4@8.188,33.588 ; v1(7.366,42.291) 7.366,33.528 bianmaqi1.4@7.747,33.147 ; v1(37.846,66.548) 38.188,66.89 U1.24@42.415,66.89
  Bottom Layer w0.254: v1@7.294,42.363 ccw(c7.121,42.536) 7.366,42.536 ccw(c7.611,42.536) v1@7.438,42.363 ; v1(7.366,42.291) 7.366,53.34 9.017,54.991 18.923,54.991 19.485,55.553 21.517,55.553 23.241,57.277 23.241,60.325 29.464,66.548 v1(37.846,66.548) ; v1@37.774,66.476 ccw(c37.601,66.303) 37.601,66.548 ccw(c37.601,66.793) v1@37.774,66.62
BLACK2: bianmaqi2.4 U1.60 | length 64.9
  Top Layer w0.254: U1.60@57.915,70.89 77.319,70.89 87.503,60.706 bianmaqi2.4@87.503,33.401 ; bianmaqi2.4@87.062,33.842 ccw(c85.999,34.905) 87.503,34.905 ccw(c89.007,34.905) bianmaqi2.4@87.944,33.842 ; bianmaqi2.4@87.242,33.662 ccw(c86.612,34.292) 87.503,34.292 ccw(c88.394,34.292) bianmaqi2.4@87.764,33.662
CS0: SD.4 U1.51 | length 58
  Top Layer w0.254: v1(44.667,71.669) 46.396,71.669 47.491,70.574 52.362,70.574 56.546,66.39 U1.51@57.915,66.39
  Bottom Layer w0.254: SD.4@13.783,86.173 cw(c12.72,85.11) 14.224,85.11 cw(c15.728,85.11) SD.4@14.665,86.173 ; SD.4@13.963,86.353 cw(c13.333,85.723) 14.224,85.723 cw(c15.115,85.723) SD.4@14.485,86.353 ; SD.4@14.224,86.614 14.224,83.82 26.87,71.174 28.973,71.174 29.602,71.803 44.534,71.803 v1(44.667,71.669)
D0: camera1.11 U1.63 | length 67.7
  Top Layer w0.254: 14.478,95.885 ccw(c15.742,97.149) camera1.11@15.841,95.364 ; 14.88,95.483 ccw(c15.784,96.387) camera1.11@15.855,95.11 ; 14.991,95.372 cw(c14.361,94.742) camera1.11@15.252,94.742 ; camera1.11@15.875,94.742 15.621,94.742 14.351,96.012 14.158,95.819 12.889,95.819 12.065,94.995 12.065,90.932 14.425,88.572 27.633,88.572 28.325,87.88 32.135,87.88 v1(40.64,79.375) ; v1@40.538,79.375 ccw(c40.293,79.375) 40.467,79.548 ccw(c40.64,79.722) v1@40.64,79.477 ; v1@46.863,73.812 cw(c46.863,73.567) 47.036,73.741 cw(c47.21,73.914) v1@46.965,73.914 ; v1(46.863,73.914) 48.387,72.39 U1.63@57.915,72.39
  Bottom Layer w0.254: v1@40.64,79.273 cw(c40.64,79.028) 40.813,79.202 cw(c40.987,79.375) v1@40.742,79.375 ; v1(40.64,79.375) 44.412,75.603 44.412,74.69 45.188,73.914 v1(46.863,73.914) ; v1@46.791,73.842 ccw(c46.618,73.669) 46.618,73.914 ccw(c46.618,74.159) v1@46.791,73.986
D1: camera1.12 U1.64 | length 54.9
  Top Layer w0.254: camera1.12@15.875,91.579 cw(c15.875,89.768) 17.155,91.049 ; camera1.12@15.875,91.833 cw(c15.875,90.636) 16.722,91.482 ; camera1.12@15.875,92.202 16.002,92.202 19.057,89.147 27.806,89.147 28.554,88.398 33.012,88.398 37.084,84.326 v1@37.084,84.263 ; camera1.12@16.498,92.202 ccw(c17.695,92.202) 16.849,91.355 ; 36.732,84.678 cw(c36.128,84.074) v1@36.982,84.074 ; v1(46.863,78.359) 49.911,78.359 55.245,73.025 ; v1@46.935,78.287 cw(c47.108,78.114) 47.108,78.359 cw(c47.108,78.604) v1@46.935,78.431 ; 55.38,72.89 U1.64@57.915,72.89
  Bottom Layer w0.254: v1@37.084,83.972 cw(c37.084,83.727) 37.257,83.901 cw(c37.431,84.074) v1@37.186,84.074 ; v1(37.084,84.074) 42.799,78.359 v1(46.863,78.359) ; v1@46.791,78.287 ccw(c46.618,78.114) 46.618,78.359 ccw(c46.618,78.604) v1@46.791,78.431
D2: camera1.13 U1.97 | length 46.1
  Top Layer w0.254: camera1.13@13.335,94.119 cw(c13.335,92.615) 14.399,93.678 cw(c15.462,94.742) camera1.13@13.958,94.742 ; camera1.13@13.335,94.373 cw(c13.335,93.482) 13.965,94.112 cw(c14.595,94.742) camera1.13@13.704,94.742 ; camera1.13@13.335,94.742 14.798,93.279 14.798,91.756 15.875,90.679 v1(15.875,90.17) ; v1(45.085,81.534) 45.665,80.954 U1.97@45.665,80.14 U1.97@45.642,80.163
  Bottom Layer w0.254: v1@15.947,90.098 cw(c16.427,89.618) 16.427,90.297 ; v1@16.002,90.297 22.201,90.297 22.884,89.614 28.218,89.614 29.434,88.398 41.323,88.398 44.656,85.065 44.656,82.066 45.085,81.637 v1(45.085,81.534)
D3: camera1.14 U1.98 | length 46.2
  Top Layer w0.254: camera1.14@12.954,91.709 cw(c12.352,90.932) 13.335,90.932 ; camera1.14@13.109,91.91 cw(c12.753,91.45) 13.335,91.45 cw(c13.917,91.45) camera1.14@13.561,91.91 ; camera1.14@13.335,92.202 13.335,90.932 ; camera1.14@13.716,91.709 ccw(c14.318,90.932) 13.335,90.932 ; 13.961,90.306 cw(c13.571,89.916) v1@14.122,89.916 ; v1(14.224,89.916) 14.224,90.043 13.335,90.932 ; v1(42.545,86.233) 42.037,85.725 42.037,81.661 v1(42.799,80.899) ; U1.98@45.165,80.14 45.165,79.168 v1(45.212,79.121)
  Bottom Layer w0.254: v1(14.224,89.916) 15.343,89.916 16.099,89.16 28.03,89.16 29.246,87.944 41.088,87.944 v1@42.672,86.36 ; v1@14.296,89.844 cw(c14.469,89.671) 14.469,89.916 cw(c14.469,90.161) v1@14.296,89.988 ; 42.799,80.645 44.323,79.121 v1(45.212,79.121)
D3.3V: 3.3v.1 3.3v.2 3.3v.3 3.3v.4 AMS1.2 AMS1.4 C3.1 C5.1 C11.2 C18.1 C19.2 c31.2 c32.2 c33.2 c34.2 DS2.1 JTAG.1 JTAG.2 K2.2 L1.2 NOKIA1.1 R1.1 R3.2 U1.6 U1.11 U1.19 U1.28 U1.50 U1.75 U1.100 | length 346
  Top Layer w0.254: c34.2@35.954,65.708 cw(c36.45,65.212) c34.2@36.45,65.913 ; c34.2@36.134,65.528 cw(c37.064,64.598) 37.064,65.913 ; c34.2@36.193,65.913 44.604,65.913 ; c34.2@36.248,66.218 ccw(c36.984,66.954) 36.984,65.913 ; c34.2@36.427,65.679 cw(c36.992,65.115) 36.992,65.913 ; c34.2@36.427,66.398 ccw(c37.597,67.567) 37.597,65.913 ; U1.6@42.415,75.89 41.226,75.89 41.082,75.746 40.979,75.746 40.163,74.93 41.68,73.413 42.392,73.413 U1.11@42.415,73.39 42.438,73.367 43.15,73.367 43.342,73.175 43.342,69.482 43.434,69.39 ; U1.19@42.672,69.413 42.695,69.39 U1.19@42.718,69.367 ; c32.2@44.165,83.091 43.18,82.106 43.18,81.661 44.165,80.676 U1.100@44.165,80.14 ; U1.100@44.188,80.117 U1.100@44.165,80.14 ; U1.28@45.165,64.64 45.142,64.663 45.142,65.375 44.604,65.913 ; v1@50.22,76.636 ccw(c50.047,76.463) 50.047,76.708 ccw(c50.047,76.953) v1@50.22,76.78 ; v1(50.292,76.708) 47.597,76.708 45.867,78.438 44.982,78.438 44.165,79.255 U1.100@44.165,80.14 ; v1@56.032,65.659 ccw(c55.787,65.659) 55.961,65.832 ccw(c56.134,66.006) v1@56.134,65.761 ; U1.50@56.165,64.64 56.896,64.64 ; v1@56.165,65.628 v1(56.134,65.659) ; v1@56.236,65.659 ccw(c57.101,65.659) 56.489,65.047 ; U1.75@57.848,78.457 U1.75@57.915,78.39 ; 61.4,66.228 ccw(c60.316,67.312) c33.2@61.849,67.312 ; 61.707,66.534 cw(c62.357,65.884) c33.2@62.357,66.804 ; 61.834,66.661 ccw(c61.183,67.312) c33.2@62.103,67.312 ; c33.2@62.484,67.312 59.812,64.64 56.896,64.64 ; 44.604,65.913 44.604,67.913 46.736,67.913 53.88,67.913 v1(56.134,65.659) ; v1(56.134,65.659) 56.134,65.402 56.896,64.64
  Top Layer w0.3: U1.19@42.415,69.39 42.695,69.39 43.434,69.39 45.259,69.39 46.736,67.913
  Top Layer w0.5: c32.2@43.942,83.314 c32.2@44.165,83.091
  Top Layer w0.6: c33.2@62.374,67.075 cw(c61.802,66.503) 62.611,66.503 cw(c63.42,66.503) c33.2@62.848,67.075 ; c33.2@62.484,67.312 62.611,67.185 v3(62.611,65.405) ; v7(63.627,55.499) 65.024,56.896 C3.1@65.024,58.803 ; C3.1@64.787,58.566 cw(c64.215,57.994) 65.024,57.994 cw(c65.833,57.994) C3.1@65.261,58.566 ; C3.1@65.024,58.253 cw(c65.699,58.253) C3.1@65.222,58.73
  Top Layer w1: NOKIA1.1@3.175,58.674 7.174,54.675 10.579,54.675 10.989,54.265 10.989,52.031 14.19,48.83 20.766,48.83 v4(21.59,48.006) ; v3(61.595,80.518) 64.864,80.518 65.758,79.624 67.338,79.624 68.199,80.485 v4(68.199,80.645) ; v7@65.786,52.324 71.067,47.043 71.067,40.928 71.916,40.079 80.357,40.079 82.984,42.706 82.984,54.028 3.3v.1@83.82,54.864 ; 82.984,52.242 cw(c86.442,52.242) 3.3v.1@83.997,54.687
  Bottom Layer w0.254: L1.2@33.655,69.469 34.925,70.739 36.679,70.739 37.108,71.168 41.989,71.168 v1(43.688,69.469) ; v1(50.292,76.708) 55.931,76.708 56.134,76.911 ; v1@50.364,76.636 cw(c50.537,76.463) 50.537,76.708 cw(c50.537,76.953) v1@50.364,76.78 ; v1@56.062,65.731 ccw(c55.889,65.904) 56.134,65.904 ccw(c56.379,65.904) v1@56.206,65.731 ; v1(56.134,65.659) 56.134,76.911 ; c31.2@56.771,83.818 57.912,82.677 v1@57.912,78.626 ; c31.2@57.023,84.172 ccw(c58.151,84.044) 57.348,83.241 ; c31.2@57.275,84.143 ccw(c58.82,83.967) 57.721,82.868 ; v1@57.747,78.626 cw(c57.502,78.626) 57.675,78.453 cw(c57.848,78.279) v1@57.848,78.524 ; v1@57.777,78.698 ccw(c57.45,79.025) 57.912,79.025 ; v1(57.848,78.626) 56.134,76.911
  Bottom Layer w0.4: L1.2@33.817,68.959 cw(c35.438,68.959) 34.292,70.106 ; L1.2@34.217,68.959 cw(c36.804,68.959) 34.975,70.789
  Bottom Layer w0.5: c31.2@56.771,83.818 v1(56.771,84.328) ; 80.899,73.787 91.186,84.074 v1(93.345,84.074)
  Bottom Layer w0.6: 24.289,54.07 27.845,54.07 K2.2@30.861,51.054 ; K2.2@30.411,51.054 ccw(c29.325,51.054) 30.093,51.822 ccw(c30.861,52.59) K2.2@30.861,51.504 ; v3(62.611,65.405) 64.155,63.861 64.155,61.458 65.151,60.462 v3(65.151,58.801) ; v7(63.627,55.499) 63.627,54.61 v7(65.786,52.451)
  Bottom Layer w1: NOKIA1.1@3.175,58.674 C11.2@3.175,61.339 ; v1@16.129,73.66 20.83,68.959 L1.2@33.655,68.959 L1.2@33.655,69.469 ; v4(21.59,48.006) 21.59,51.37 24.289,54.07 v3(35.941,65.721) ; v1@57.912,78.626 59.931,80.645 C5.1@61.47,80.645 ; v4(68.199,80.645) 72.007,76.837 72.007,74.64 72.418,74.23 72.9,74.23 v1(73.724,73.406) 74.547,74.23 75.029,74.23 75.475,74.676 78.955,74.676 AMS1.2@80.899,72.732 ; 80.899,73.787 AMS1.2@80.899,72.732 ; AMS1.4@81.129,66.049 ccw(c82.755,65.864) 81.598,64.706 ; AMS1.4@82.122,65.936 ccw(c85.388,65.564) 83.064,63.24 ; 3.3v.1@83.82,54.864 3.3v.2@83.82,57.404 3.3v.3@83.82,59.944 3.3v.4@83.82,62.484 80.899,65.405 AMS1.4@80.899,65.967 ; JTAG.2@94.361,68.326 JTAG.1@91.821,68.326 89.462,65.967 AMS1.4@80.899,65.967 ; AMS1.4@80.899,65.967 AMS1.2@80.899,72.717 AMS1.2@80.899,72.732 ; 72.633,74.014 ccw(c73.469,74.851) 73.469,73.668 cw(c73.469,74.851) 72.633,74.014 ; C18.1@73.977,73.668 ccw(c73.977,74.851) 74.814,74.014 cw(c73.977,74.851) C18.1@73.977,73.668
  other v1: 16.129,73.787
D4: camera1.15 U1.3 | length 43.5
  Top Layer w0.254: v1(38.608,77.089) 38.909,77.39 U1.3@42.415,77.39
  Bottom Layer w0.254: camera1.15@10.512,94.187 cw(c10.277,93.725) 10.795,93.725 ; camera1.15@10.795,94.742 10.795,93.725 ; camera1.15@11.078,94.187 ccw(c11.313,93.725) 10.795,93.725 ; v1(38.608,77.089) 38.227,77.089 26.61,88.706 12.767,88.706 9.718,91.756 9.718,92.648 10.795,93.725
D5: camera1.16 U1.92 | length 48.8
  Top Layer w0.254: v1@37.338,90.703 cw(c37.338,90.067) 37.788,90.517 40.929,87.376 44.423,87.376 48.498,83.301 48.498,82.841 48.165,82.508 U1.92@48.165,80.14
  Bottom Layer w0.254: camera1.16@10.795,91.579 cw(c10.795,90.075) 11.859,91.138 cw(c12.922,92.202) camera1.16@11.418,92.202 ; camera1.16@10.795,91.833 cw(c10.795,90.942) 11.425,91.572 cw(c12.055,92.202) camera1.16@11.164,92.202 ; camera1.16@10.795,92.202 12.192,90.805 v1(37.338,90.805) ; v1@37.266,90.733 ccw(c37.093,90.56) 37.093,90.805 ccw(c37.093,91.05) v1@37.266,90.877
D6: camera1.17 U1.4 | length 49.8
  Top Layer w0.254: camera1.17@8.255,94.119 cw(c8.255,92.615) 9.319,93.678 cw(c10.382,94.742) camera1.17@8.878,94.742 ; camera1.17@8.255,94.373 cw(c8.255,93.482) 8.885,94.112 cw(c9.515,94.742) camera1.17@8.624,94.742 ; camera1.17@8.255,94.742 9.652,93.345 v1(9.652,90.551) ; v1@9.58,90.623 ccw(c9.407,90.796) 9.652,90.796 ccw(c9.897,90.796) v1@9.724,90.623 ; v1(38.862,76.073) 38.862,76.2 39.424,76.762 40.186,76.762 40.314,76.89 U1.4@42.415,76.89 ; v1@38.964,76.073 cw(c39.515,76.073) 39.125,76.463
  Bottom Layer w0.254: v1@9.652,90.449 cw(c9.652,90.204) 9.825,90.378 cw(c9.999,90.551) v1@9.754,90.551 ; v1(9.652,90.551) 11.951,88.252 26.415,88.252 26.529,88.138 ; 26.289,88.138 26.529,88.138 ; 38.243,76.431 ccw(c38.862,77.05) v1@38.862,76.175 ; v1(38.862,76.073) 38.601,76.073 26.536,88.138 26.529,88.138
D7: camera1.18 U1.5 | length 48.8
  Top Layer w0.254: camera1.18@7.839,91.738 cw(c7,90.805) 8.255,90.805 ; camera1.18@8.008,91.927 cw(c7.512,91.375) 8.255,91.375 cw(c8.998,91.375) camera1.18@8.502,91.927 ; camera1.18@8.255,92.202 8.255,90.805 ; camera1.18@8.671,91.738 ccw(c9.51,90.805) 8.255,90.805 ; v1@9.804,89.154 ccw(c9.559,89.154) 9.733,89.327 ccw(c9.906,89.501) v1@9.906,89.256 ; v1(9.906,89.154) 8.255,90.805 ; v1(26.162,86.995) 29.083,86.995 v1(29.21,87.122) ; v1@26.234,86.923 cw(c26.407,86.75) 26.407,86.995 cw(c26.407,87.24) v1@26.234,87.067 ; 28.658,86.995 ccw(c28.658,87.674) v1@29.138,87.194 ; v1(39.751,75.819) 40.24,76.308 41.002,76.308 ; 40.894,76.2 41.002,76.308 ; U1.5@42.438,76.413 U1.5@42.415,76.39 41.194,76.39 41.171,76.413 41.107,76.413 41.002,76.308
  Bottom Layer w0.254: v1@9.906,89.052 cw(c9.906,88.807) 10.079,88.981 cw(c10.253,89.154) v1@10.008,89.154 ; v1(9.906,89.154) 11.369,87.691 22.729,87.691 23.425,86.995 v1(26.162,86.995) ; v1@26.09,86.923 ccw(c25.917,86.75) 25.917,86.995 ccw(c25.917,87.24) v1@26.09,87.067 ; v1@29.21,87.02 cw(c29.21,86.411) 29.641,86.842 ; v1(29.21,87.122) 29.361,87.122 39.418,77.065 39.418,76.152 v1(39.751,75.819)
D12V: 7.7 9.7 10.7 11.7 K1.2 U2.1 U3.1 | length 184.8
  Top Layer w0.254: U3.1@66.548,82.024 U3.1@66.911,82.024
  Top Layer w1: U3.1@66.548,82.024 66.548,83.058 v10(69.215,85.725)
  Bottom Layer w1: 7.7@25.654,33.782 25.781,33.655 25.781,28.767 25.871,28.857 37.592,28.857 ; 9.7@37.592,33.782 37.592,28.857 ; 10.7@48.641,33.782 48.641,28.984 48.768,28.857 ; 11.7@59.817,33.782 59.817,28.857 ; U2.1@71.628,83.312 U2.1@71.628,82.024 78.595,82.024 82.296,85.725 87.63,85.725 K1.2@91.313,89.408 ; 96.423,86.487 96.423,35.499 92.419,31.495 92.419,28.857 59.817,28.857 ; 37.592,28.857 48.768,28.857 ; 48.768,28.857 59.817,28.857
  Bottom Layer w1.2: v10(69.215,85.725) U2.1@71.628,83.312 ; K1.2@91.313,89.408 93.502,89.408 96.423,86.487
FO0D: camera1.7
G: U1.16 XYZ1.6 | length 23.1
  Top Layer w0.254: v1@38.481,70.739 38.632,70.89 U1.16@42.415,70.89
  Bottom Layer w0.254: 38.306,70.252 cw(c38.714,70.252) v1@38.426,70.54 ; v1@38.402,70.66 v1(38.354,70.612) 38.306,70.564 38.306,67.515 38.856,66.966 38.856,63.379 41.59,60.644 41.59,59.121 XYZ1.6@43.053,57.658 ; XYZ1.6@42.43,57.658 ccw(c40.926,57.658) 41.989,58.722 ccw(c43.053,59.785) XYZ1.6@43.053,58.281 ; XYZ1.6@42.684,57.658 ccw(c41.793,57.658) 42.423,58.288 ccw(c43.053,58.918) XYZ1.6@43.053,58.027
GEAR1: gear.2 U1.35 | length 35.1
  Top Layer w0.254: U1.35@48.665,64.64 48.665,66.064 48.895,66.294 49.784,66.294 ; v1@49.966,66.222 ccw(c49.793,66.049) 49.793,66.294 ccw(c49.793,66.539) v1@49.966,66.366
  Bottom Layer w0.254: v1(50.038,66.294) 50.213,66.469 52.53,66.469 59.772,59.227 61.005,59.227 66.003,54.229 gear.2@72.517,54.229 ; v1@50.11,66.222 cw(c50.705,65.627) 50.705,66.469 ; gear.2@72.076,53.788 ccw(c71.013,52.725) 71.013,54.229 ccw(c71.013,55.733) gear.2@72.076,54.67 ; gear.2@72.256,53.968 ccw(c71.626,53.338) 71.626,54.229 ccw(c71.626,55.12) gear.2@72.256,54.49
GEAR2: gear.5 U1.36 | length 40.2
  Top Layer w0.254: U1.36@49.165,64.64 49.188,64.663 49.188,65.375 49.472,65.659 50.546,65.659 v1(50.8,65.913) ; v1@53.522,59.254 ccw(c53.349,59.427) 53.594,59.427 ccw(c53.839,59.427) v1@53.666,59.254 ; v1@53.522,62.158 cw(c53.349,61.985) 53.594,61.985 cw(c53.839,61.985) v1@53.666,62.158 ; v1(53.594,59.182) v1(53.594,62.23)
  Bottom Layer w0.254: v1@50.8,65.811 cw(c50.8,65.566) 50.973,65.74 cw(c51.147,65.913) v1@50.902,65.913 ; v1(50.8,65.913) 53.594,63.119 53.594,62.484 ; v1@53.522,62.302 ccw(c53.349,62.475) 53.594,62.475 ccw(c53.839,62.475) v1@53.666,62.302 ; 53.594,58.952 62.635,49.911 69.215,49.911 gear.5@72.517,46.609 ; v1@53.696,59.182 ccw(c54.495,59.182) 53.93,58.617 ; gear.5@71.894,46.609 ccw(c70.39,46.609) 71.453,47.673 ccw(c72.517,48.736) gear.5@72.517,47.232 ; gear.5@72.148,46.609 ccw(c71.257,46.609) 71.887,47.239 ccw(c72.517,47.869) gear.5@72.517,46.978
GEAR3: gear.7 U1.32 | length 51.4
  Top Layer w0.254: U1.32@47.165,64.64 47.188,64.663 47.188,65.375 48.742,66.929 49.784,66.929 ; 49.486,66.929 ccw(c49.486,67.608) v1@49.966,67.128
  Bottom Layer w0.254: v1(50.038,67.056) 52.959,67.056 60.334,59.681 61.193,59.681 65.756,55.118 71.883,55.118 72.071,55.306 73.345,55.306 73.66,54.991 73.66,42.672 gear.7@72.517,41.529 ; v1@50.11,66.984 cw(c50.283,66.811) 50.283,67.056 cw(c50.283,67.301) v1@50.11,67.128 ; gear.7@72.517,41.898 ccw(c72.517,42.789) 73.147,42.159 ccw(c73.777,41.529) gear.7@72.886,41.529 ; gear.7@72.517,42.152 ccw(c72.517,43.656) 73.581,42.593 ccw(c74.644,41.529) gear.7@73.14,41.529
GND: 1.2 2.2 3.2 7.1 9.1 10.1 11.1 AMS1.1 bianmaqi1.1 bianmaqi2.1 C7.2 C8.2 C9.2 C10.1 C11.1 C12.1 C13.2 C14.1 C15.1 C16.2 C17.1 C18.2 C19.1 C20.1 C22.2 c31.1 c32.1 c33.1 c34.1 C42.2 camera1.2 camera1.10 chu.11 chu.12 chu.23 chu.24 DC_IN.2 DC_IN.3 extra.6 gear.3 gear.6 gnd.1 gnd.2 gnd.3 gnd.4 JTAG.4 JTAG.6 JTAG.8 JTAG.10 JTAG.12 JTAG.14 JTAG.16 JTAG.18 JTAG.20 NOKIA1.2 P1.2 R5.2 R6.2 R9.2 R10.2 R13.2 R14.2 R17.2 R18.2 R19.2 R21.1 RESET.1 SD.7 U1.10 U1.20 U1.27 U1.74 U1.99 U2.4 U3.4 usart.3 XYZ1.2 | length 115
  Top Layer w0.254: v1@10.668,81.026 12.065,82.423 v1(17.526,82.423) ; v1(20.955,81.153) 21.844,82.042 v1(21.844,83.566) ; v1(22.606,34.671) 23.241,35.306 C10.1@28.192,35.306 30.146,35.306 31.235,34.217 33.982,34.217 v1(34.163,34.036) ; v1(23.622,70.739) 24.584,69.777 27.794,69.777 27.805,69.788 29.345,69.788 30.171,68.963 C22.2@33.655,68.963 34.082,68.963 35.044,69.925 36.838,69.925 37.873,68.89 U1.20@42.415,68.89 43.339,68.89 ; chu.24@33.401,92.329 chu.23@33.401,94.869 ; v1(36.576,33.782) 38.606,33.782 C12.1@40.13,35.306 ; U1.10@42.415,73.89 42.438,73.867 43.292,73.867 43.815,73.344 43.815,72.263 44.112,71.966 44.112,71.228 44.323,71.017 v1(44.323,70.231) ; v1@42.926,85.09 43.74,84.276 44.839,84.276 45.801,83.314 c32.1@46.228,83.314 ; 43.362,68.913 43.339,68.89 ; v1@43.913,68.326 v1(43.903,68.326) 43.339,68.89 ; 44.196,81.407 44.665,80.938 U1.99@44.665,80.14 ; U1.27@44.665,64.64 44.688,64.617 44.688,63.905 45.085,63.508 v1(45.085,63.373) ; v1(57.023,79.375) 57.023,78.781 56.988,78.746 56.988,78.105 57.18,77.913 57.892,77.913 U1.74@57.915,77.89 ; v1(57.023,81.407) 57.912,81.407 P1.2@60.706,84.201
  Bottom Layer w0.254: v1(17.526,82.423) 18.796,81.153 v1(20.955,81.153) ; v1(20.447,74.549) 23.622,71.374 v1(23.622,70.739) ; v1(21.844,83.566) 27.432,83.566 33.528,77.47 v1(33.528,76.581) ; v1(34.163,34.036) 36.449,34.036 ; 39.878,84.836 40.003,84.836 ; v1(42.931,85.085) 40.251,85.085 40.003,84.836 ; v1(44.069,81.661) 40.894,84.836 40.003,84.836 ; v1(44.323,70.231) 44.323,68.746 v1(43.903,68.326) 43.903,67.118 44.244,66.778 44.244,64.214 v1(45.085,63.373) ; v1(57.023,79.375) v1(57.023,81.407)
  other v1: 33.406,30.983 56.266,30.983 45.217,31.11 5.461,53.467 14.986,53.848 64.77,67.312 18.288,69.215 73.722,75.692 78.994,76.835 10.541,80.899
GND2: C21.1 c100.2 C101.2 C102.2 C103.2 chu1.6 r60.1 r61.1 r62.1 r63.1 s0.3 s1.3 s2.3 s3.3 U4.12
GND4: C90.1 C104.2 C105.2 C106.2 C107.2 chu2.6 r64.1 r65.1 r66.1 r67.1 s4.3 s5.3 s6.3 s7.3 U5.12
HREF: camera1.6 U1.29 | length 47.8
  Top Layer w0.254: camera1.6@23.495,91.579 cw(c23.495,90.075) 24.559,91.138 cw(c25.622,92.202) camera1.6@24.118,92.202 ; camera1.6@23.495,91.833 cw(c23.495,90.942) 24.125,91.572 cw(c24.755,92.202) camera1.6@23.864,92.202 ; camera1.6@23.495,92.202 26.089,89.608 27.987,89.608 28.743,88.852 33.2,88.852 43.342,78.71 43.342,78.197 45.555,75.984 46.722,75.984 47.625,75.081 v1(47.625,75.057) ; U1.29@45.665,64.64 45.665,65.985 v1(45.693,66.013) ; 45.665,65.701 cw(c46.004,65.701) v1@45.764,65.941 ; 47.435,75.271 cw(c47.221,75.057) v1@47.523,75.057
  Bottom Layer w0.254: v1@45.621,66.084 ccw(c45.447,66.258) 45.693,66.258 ccw(c45.938,66.258) v1@45.764,66.084 ; v1(45.693,66.013) 45.693,71.855 47.625,73.787 v1(47.625,75.057) ; v1@47.553,74.985 cw(c47.38,74.812) 47.625,74.812 cw(c47.87,74.812) v1@47.697,74.985
IN1: R15.2 U1.67 | length 64.7
  Top Layer w0.254: v1@55.264,74.276 cw(c55.54,74) 55.54,74.39 ; v1@55.444,74.096 cw(c56.153,73.387) 56.153,74.39 ; v1@55.499,74.295 55.594,74.39 U1.67@57.915,74.39 ; R15.2@66.423,35.306 66.802,35.306 v1(68.834,37.338) ; R15.2@66.423,35.433 ccw(c66.423,36.655) 67.287,35.791 ; R15.2@66.423,35.687 ccw(c66.423,37.523) 67.721,36.225 ; R15.2@66.423,35.941 ccw(c66.423,38.39) 68.154,36.658 ; v1@68.732,37.338 cw(c68.487,37.338) 68.661,37.165 cw(c68.834,36.991) v1@68.834,37.236
  Bottom Layer w0.254: v1@55.27,74.168 cw(c55.025,74.168) 55.199,73.995 cw(c55.372,73.821) v1@55.372,74.066 ; v1(55.372,74.168) 51.562,70.358 50.546,70.358 49.403,69.215 49.276,69.215 49.276,63.119 51.106,61.289 51.106,59.174 51.298,58.982 52.922,58.982 62.53,49.374 68.258,49.374 68.834,48.799 v1(68.834,37.338) ; v1@68.762,37.41 ccw(c68.589,37.583) 68.834,37.583 ccw(c69.079,37.583) v1@68.906,37.41
IN2: R11.2 U1.68 | length 57.2
  Top Layer w0.254: v1@54.756,74.784 cw(c55.013,74.527) 55.013,74.89 ; v1(54.864,74.676) 55.078,74.89 U1.68@57.915,74.89 ; v1@54.936,74.604 cw(c55.626,73.914) 55.626,74.89 ; R11.2@54.993,35.306 57.028,37.342 57.028,37.724 v1(57.15,37.846) ; R11.2@54.993,35.687 ccw(c54.993,36.607) 55.643,35.956 ; R11.2@54.993,35.941 ccw(c54.993,37.474) 56.077,36.39 ; R11.2@55.501,35.433 cw(c56.42,35.433) 55.77,36.083 ; v1@57.84,41.474 ccw(c57.667,41.647) 57.912,41.647 ccw(c58.157,41.647) v1@57.984,41.474 ; v1@57.84,46.791 cw(c57.667,46.618) 57.912,46.618 cw(c58.157,46.618) v1@57.984,46.791 ; v1(57.912,41.402) v1(57.912,46.863) v1@58.039,46.736
  Bottom Layer w0.254: 54.237,74.518 ccw(c54.237,75.303) v1@54.792,74.748 ; v1(54.864,74.676) 54.706,74.518 53.999,74.518 53.961,74.555 53.454,74.555 48.822,69.923 48.822,62.931 50.652,61.101 50.652,57.342 57.912,50.082 v1(57.912,46.863) ; v1(57.15,37.846) 57.912,38.608 v1(57.912,41.402) ; v1@57.15,37.948 ccw(c57.15,38.193) 57.323,38.019 ccw(c57.497,37.846) v1@57.252,37.846 ; v1@57.84,41.33 cw(c57.667,41.157) 57.912,41.157 cw(c58.157,41.157) v1@57.984,41.33 ; v1@57.84,46.935 ccw(c57.667,47.108) 57.912,47.108 ccw(c58.157,47.108) v1@57.984,46.935
IN3: R7.2 U1.69 | length 53.9
  Top Layer w0.254: R7.2@44.071,35.433 44.071,35.562 46.942,38.433 46.942,41.209 47.679,41.945 47.679,50.238 v1(46.863,51.054) ; R7.2@44.071,36.068 ccw(c44.071,37.29) 44.935,36.426 ; R7.2@44.579,35.56 cw(c45.809,35.56) 44.939,36.43 ; v1@46.863,50.952 cw(c46.863,50.707) 47.036,50.881 cw(c47.21,51.054) v1@46.965,51.054 ; v1@54.229,75.057 v1(54.229,75.073) 54.229,75.09 54.529,75.39 U1.69@57.915,75.39
  Bottom Layer w0.254: v1@46.791,51.126 ccw(c46.618,51.299) 46.863,51.299 ccw(c47.108,51.299) v1@46.935,51.126 ; v1(46.863,51.054) 46.863,57.911 48.073,59.121 49.018,59.121 49.21,59.313 49.21,61.099 48.079,62.23 48.079,70.612 52.524,75.057 53.316,75.057 53.364,75.009 54.165,75.009 v1(54.229,75.073) ; 53.829,75.009 ccw(c53.829,75.474) v1@54.157,75.145
IN4: R2.2 U1.70 | length 58.5
  Top Layer w0.254: R2.2@32.006,35.306 34.86,38.16 34.86,39.27 35.56,39.97 v1@35.56,46.99 ; R2.2@32.006,35.687 ccw(c32.006,36.607) 32.656,35.956 ; R2.2@32.006,35.941 ccw(c32.006,37.474) 33.09,36.39 ; R2.2@32.514,35.433 cw(c33.433,35.433) 32.783,36.083 ; v1@35.488,46.931 cw(c35.315,46.758) 35.56,46.758 cw(c35.805,46.758) v1@35.632,46.931 ; v1(53.594,75.565) 53.919,75.89 U1.70@57.915,75.89
  Bottom Layer w0.254: v1(35.56,47.003) 36.681,48.124 36.681,49.374 44.516,57.21 44.516,58.104 45.147,58.735 45.653,58.735 47.056,60.138 47.056,61.275 47.625,61.844 47.625,70.866 52.324,75.565 v1(53.594,75.565) ; v1@35.56,47.105 ccw(c35.56,47.35) 35.733,47.176 ccw(c35.907,47.003) v1@35.662,47.003 ; v1@53.522,75.493 ccw(c53.349,75.32) 53.349,75.565 ccw(c53.349,75.81) v1@53.522,75.637
KEY1: 1.1 U1.1 | length 37.7
  Top Layer w0.254: 1.1@9.444,74.119 ccw(c10.184,74.859) 10.184,73.812 ccw(c10.184,73.02) 1.1@9.623,73.58 ; 1.1@9.518,73.812 11.321,73.812 13.528,76.019 15.821,76.019 18.234,78.432 42.373,78.432 U1.1@42.415,78.39 ; 1.1@9.623,74.299 ccw(c10.797,75.472) 10.797,73.812 ; 41.808,78.432 cw(c41.808,78.233) U1.1@41.949,78.374
KEY2: 2.1 U1.2 | length 43
  Top Layer w0.254: 2.1@9.264,70.005 ccw(c9.264,70.932) 9.92,70.277 ; 2.1@9.264,70.259 ccw(c9.264,71.8) 10.353,70.711 ; 2.1@9.264,70.513 ccw(c9.264,72.667) 10.787,71.144 ; 2.1@9.264,70.767 ccw(c9.264,73.534) 11.22,71.578 ; 2.1@9.518,69.875 11.938,72.295 11.938,73.787 13.716,75.565 16.129,75.565 18.542,77.978 28.973,77.978 29.061,77.89 U1.2@42.415,77.89
KEY3: 3.1 U1.25 | length 40.5
  Top Layer w0.254: 3.1@9.264,64.795 9.426,64.634 16.849,64.634 ; 3.1@9.444,64.975 ccw(c10.268,65.799) 10.268,64.634 ; 3.1@9.623,64.436 cw(c10.1,63.96) 10.1,64.634 ; 3.1@9.623,65.155 ccw(c10.881,66.413) 10.881,64.634 ; 16.858,64.643 v1(41.529,64.643) ; v1@41.457,64.571 ccw(c41.284,64.398) 41.284,64.643 ccw(c41.284,64.888) v1@41.457,64.715 ; U1.25@42.415,66.39 43.109,66.39 ; 43.132,66.413 43.109,66.39 ; v1(43.688,66.548) 43.53,66.39 43.109,66.39
  Bottom Layer w0.254: v1@41.529,64.745 ccw(c41.529,65.603) 42.136,64.996 ; 41.783,64.643 v1@43.561,66.421 ; v1@43.586,66.548 cw(c43.341,66.548) 43.515,66.375 cw(c43.688,66.201) v1@43.688,66.446